# EAGLE board Esp8266Wifi-GatesOpener4 (EAGLE 9.6.2)
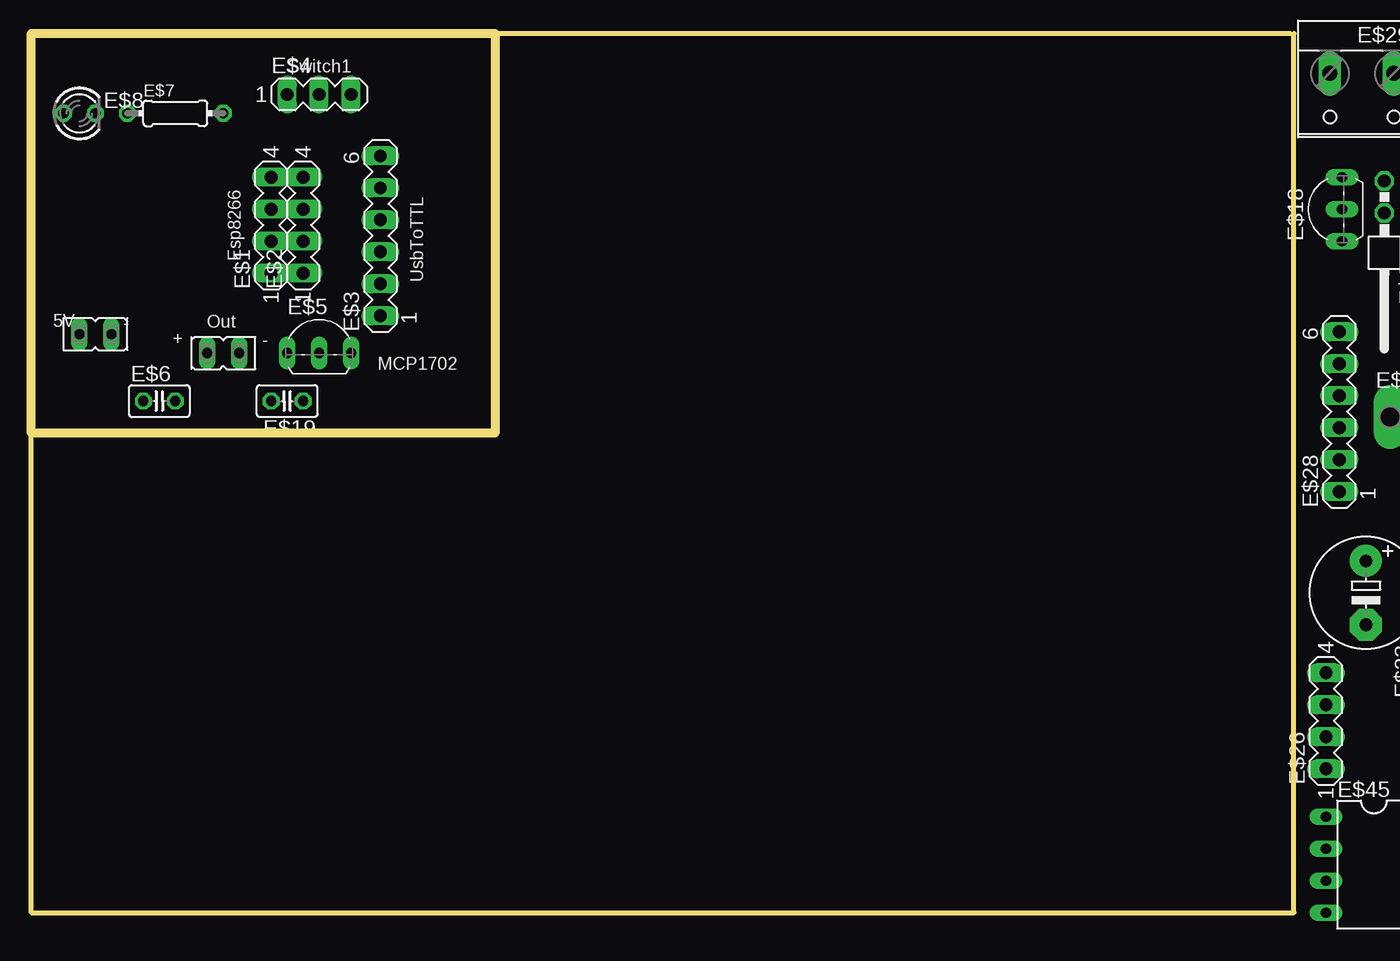
[diagram p0: board, top side]
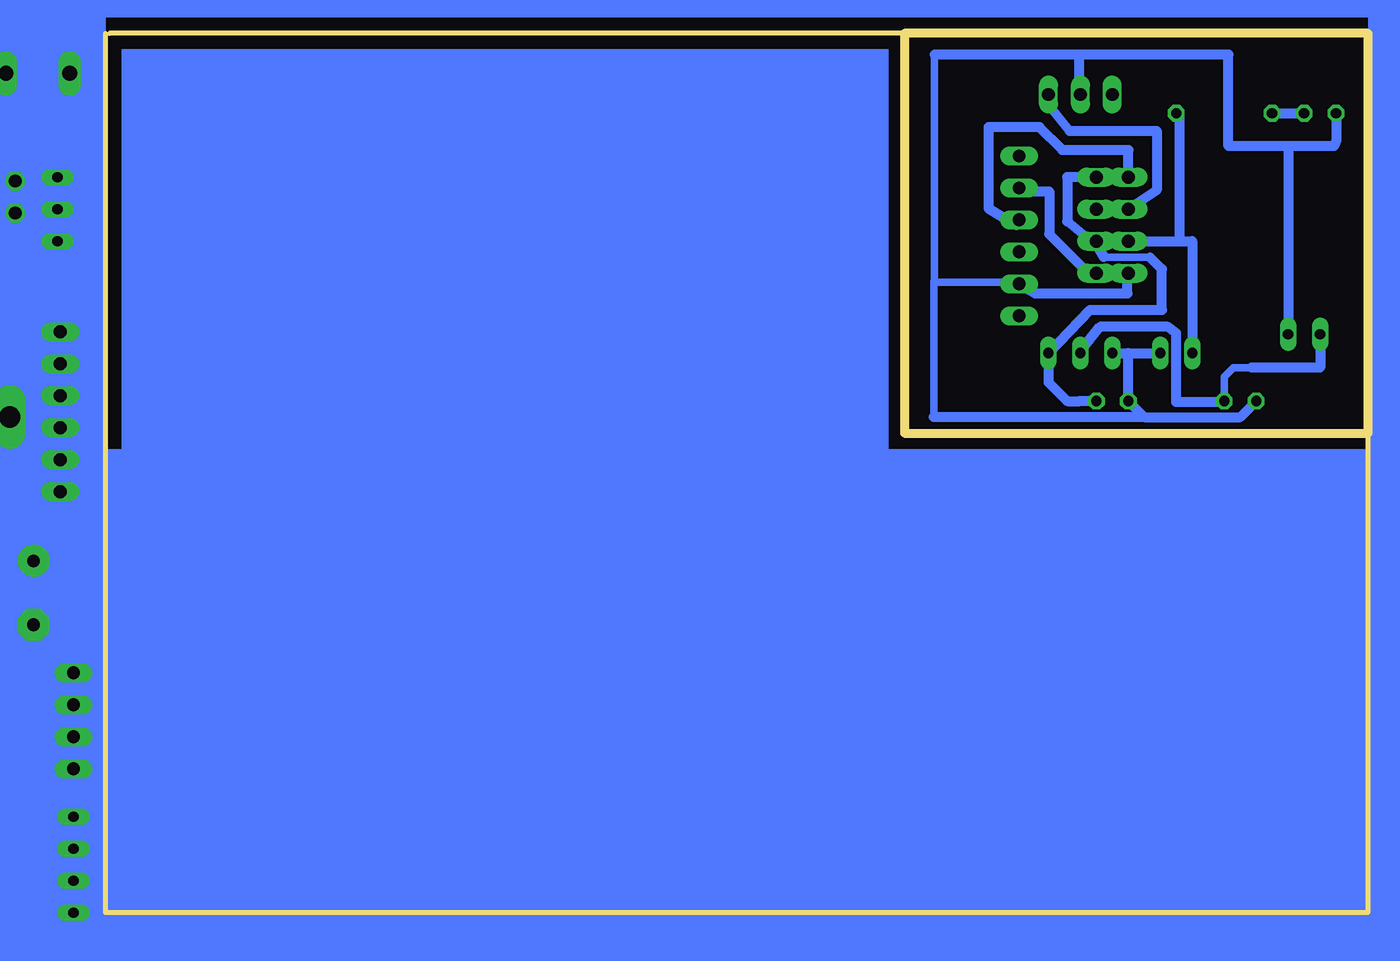
[diagram p1: board, bottom side, seen from below]

Size 100.33 x 70 mm. Coordinates in mm from the lower left corner, seen from the top.
Outline: 0,69.85 0,0 100.33,0 100.33,69.85
Outline: 0,69.85 0,70
Outline: 0,69.85 100,69.85
Outline: 0,69.85 36.83,69.85 36.83,38.1 0,38.1 0,69.85
Copper layers (1*16): Top 0.035mm / dielectric 1.5mm / Bottom 0.035mm
Design rules "default": minimum track width 10mil, minimum drill 24mil, track to track 8mil, track to pad 8mil, pad to pad 8mil, via to via 8mil, smd to smd 8mil, copper to edge 40mil, drill to drill 8mil, minimum pad ring 10mil, minimum via ring 8mil, stop-mask expansion 4mil, vias tented up to drill 0mil, thermal gap 10mil

## Footprints (pad centres in the part's own frame; a part is rotated, then mirrored left to right if it is on the bottom)
MA04-1 = drill 1.016 long: 1 -3.81,0; 2 -1.27,0; 3 1.27,0; 4 3.81,0
MA06-1 = drill 1.016 long: 1 -6.35,0; 2 -3.81,0; 3 -1.27,0; 4 1.27,0; 5 3.81,0; 6 6.35,0
MA03-1 = drill 1.016 long: 1 -2.54,0; 2 0,0; 3 2.54,0
TO92- = drill 0.813 long: 1 2.54,0; 2 0,0; 3 -2.54,0
C025-025X050 = drill 0.813 octagon: 1 -1.27,0; 2 1.27,0
0204/7 = drill 0.813 octagon: 1 -3.81,0; 2 3.81,0
LED3MM = drill 0.813 octagon: A -1.27,0; K 1.27,0
FE02-1 = drill 0.813 long: 1 -1.27,0; 2 1.27,0
1X01/90 = drill 1.016 long: 1 -1.27,-3.81
E5-8,5 = drill 1.016 pad 2.54: + -2.54,0 | drill 1.016 pad 2.54 octagon: - 2.54,0
W237-132 = drill 1.194 long: 1 -2.54,-0.635; 2 2.54,-0.635
RS-2,5 = drill 0.813 pad 1.6 octagon: 1 -1.27,0; 2 1.27,0
2X02/90 = drill 1.016 octagon: 1 -1.27,-6.35; 2 -1.27,-3.81; 3 1.27,-6.35; 4 1.27,-3.81
P1-17Y = drill 1.702 pad 2.121 long: TP 0,0
DIL08 = drill 0.813 long: 1 -3.81,-3.81; 2 -1.27,-3.81; 3 1.27,-3.81; 4 3.81,-3.81; 5 3.81,3.81; 6 1.27,3.81; 7 -1.27,3.81; 8 -3.81,3.81

## Placement (x,y rotation side)
E$1  [MA04-1]  19.05,54.61 90 top
E$2  [MA04-1]  21.59,54.61 90 top
E$3  [MA06-1]  27.73,53.76 90 top
E$4  [MA03-1]  22.86,65 0 top
E$5  [TO92-]  22.86,44.45 0 top
E$6  105  [C025-025X050]  10.16,40.64 0 top
E$7  150  [0204/7]  11.43,63.5 0 top
E$8  [LED3MM]  3.81,63.5 0 top
E$9  [FE02-1]  15.24,44.45 180 top
E$10  [FE02-1]  5.08,45.95 0 top
E$17  [0204/7]  113.03,25.4 90 top  (outside the outline)
E$18  [TO92-]  104.14,55.88 90 top  (outside the outline)
E$19  105  [C025-025X050]  20.32,40.64 180 top
E$22  [1X01/90]  112.39,40.01 180 top  (outside the outline)
E$23  [E5-8,5]  106.05,25.4 270 top  (outside the outline)
E$26  [MA04-1]  102.87,15.24 90 top
E$28  [MA06-1]  103.93,39.79 90 top  (outside the outline)
E$29  [W237-132]  105.73,66.04 180 top
E$30  [RS-2,5]  113.03,50.8 90 top  (outside the outline)
E$31  [2X02/90]  108.78,51.77 180 top  (outside the outline)
E$35  [MA04-1]  113.03,13.97 90 top  (outside the outline)
E$44  [P1-17Y]  107.95,39.37 0 top  (outside the outline)
E$45  [DIL08]  106.68,3.81 270 top

## Library data of the parts
E$1-E$4 E$26 E$28 E$35 = con-lstb
E$5 E$18 = transistor-fet
E$6 E$19 E$23 = ref-packages-longpad
E$7 E$17 = eagle-ltspice
E$8 = led
E$9 E$10 = con-lsta2
E$22 E$31 = pinhead
E$29 = con-wago-508
E$30 = discrete
E$44 = testpad
E$45 = 74xx-us

## Nets
S$2: E$7.1 E$8.K
S$3: E$2.2 E$2.4 E$5.1 E$19.1
S$5: E$1.2 E$7.2 E$9.2
S$7: E$1.3 E$4.3
S$8: E$2.1 E$3.5
S$9: E$1.4 E$3.4
S$10: E$5.2 E$6.2 E$10.1
S$11: E$1.1 E$3.2 E$4.2 E$5.3 E$6.1 E$8.A E$9.1 E$10.2 E$19.2

## Tracks (layer width: path | path; a pad name or v marks a point on that pad's centre or on a via)
S$2
  Bottom 0.813: E$7.1 E$8.K
S$3
  Bottom 0.61: 17.32,52.06 21.01,52.08
  Bottom 0.7: 23.9,54.92 21.98,53.34 E$2.2
  Bottom 0.813: 23.9,54.92 23.9,58.42 E$2.4 | E$19.1 22.9,40.64 23.9,40.64 25.4,42.13 E$5.1 22.1,47.89 16.37,47.89 16.37,51.11 17.32,52.06 | E$2.2 21.59,53.05 21.01,52.08
S$5
  Bottom 0.813: E$9.2 13.97,53.34 15,53.34 | E$1.2 15,53.34 | 15,53.34 15,63.26 E$7.2
S$7
  Bottom 0.7: E$4.3 25.4,64.18 23.73,62.1
  Bottom 0.813: E$1.3 16.8,57.4 16.8,62.1 23.73,62.1
S$8
  Bottom 0.813: E$2.1 22.23,50.8 25.33,53.9 25.33,57.3 27.03,57.3 E$3.5
S$9
  Bottom 0.813: E$1.4 19.03,60.6 24.3,60.6 26.1,62.4 30.16,62.4 30.16,55.94 27.94,54.61 E$3.4
S$10
  Bottom 0.61: 9.27,43.3 10.7,43.3 11.43,42.57 11.43,40.78
  Bottom 0.813: E$6.2 11.43,40.78 11.65,40.56 15.24,40.56 15.24,46.03 15.9,46.54 21.3,46.54 22.86,44.6 E$5.2 | 9.27,43.3 3.81,43.3 E$10.1
S$11
  Bottom 0.61: 34.45,68.15 34.45,50.19 | 34.45,50.19 34.34,50.09 28.13,50.09 | 34.5,39.37 34.5,50.14 34.45,50.19
  Bottom 0.813: E$5.3 19.05,44.45 | 19.05,44.45 E$9.1 | 19.05,44.45 E$19.2 17.78,39.37 | 17.78,39.37 34.5,39.37 | E$6.1 10.16,39.37 17.78,39.37 | 27.56,49.78 E$3.2 | 28.13,50.09 27.56,49.78 | 27.56,49.78 26.45,49.2 19.12,49.2 19.12,50.73 E$1.1 | 6.35,60.9 E$10.2 | 6.35,60.9 2.7,60.9 2.54,61.26 E$8.A | E$4.2 22.99,65.13 22.99,68.15 | 22.99,68.15 11.1,68.15 11.1,60.9 6.35,60.9 | 22.99,68.15 34.45,68.15
(copper drawn outside any net)
  shapes: Bottom area x6

## Text on the board
tPlace: Switch1 | Esp8266 | UsbToTTL | 5V | - | Out | + | - | MCP1702